# Altium PCB PCB1.PcbDoc
Units mil, origin at the board's own origin, x right, y up, seen from the top; angles counter-clockwise.
Board outline 15980 x 10455 mil, 2 copper layers (Top Layer, Bottom Layer); 35 components, 50 nets, 248 pads, 55 vias.
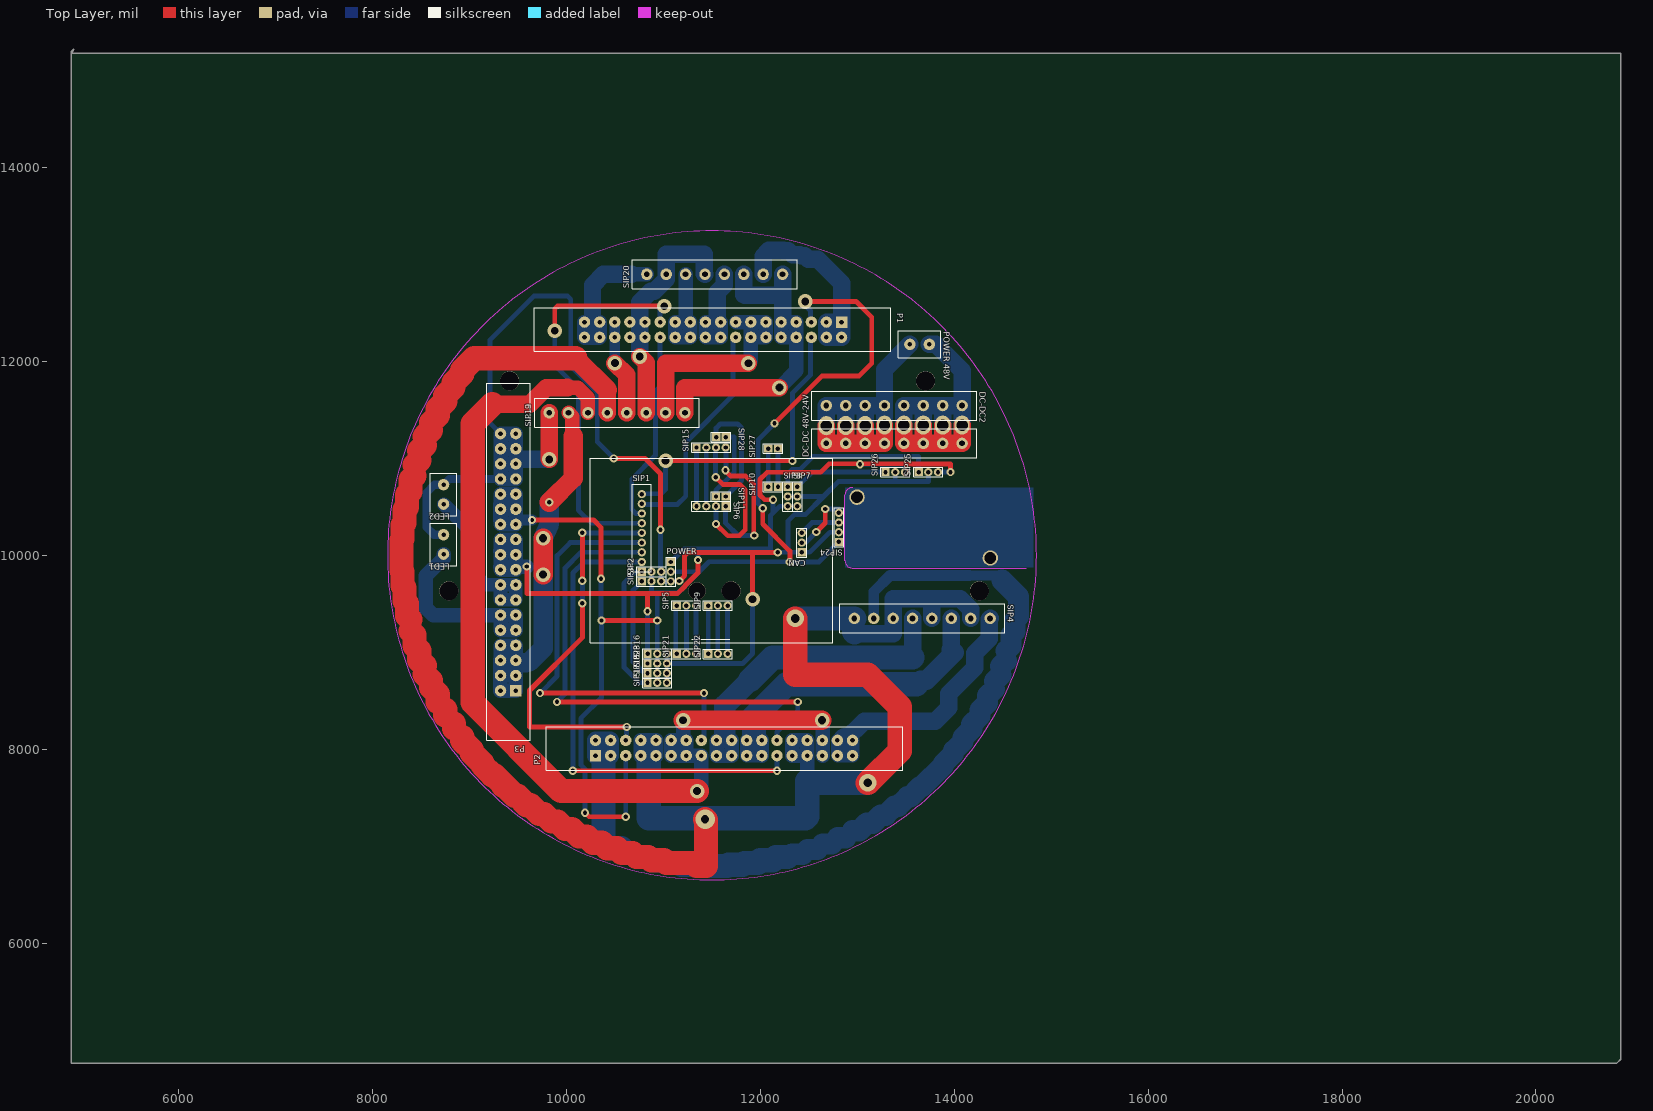
[diagram p0: Top Layer view]
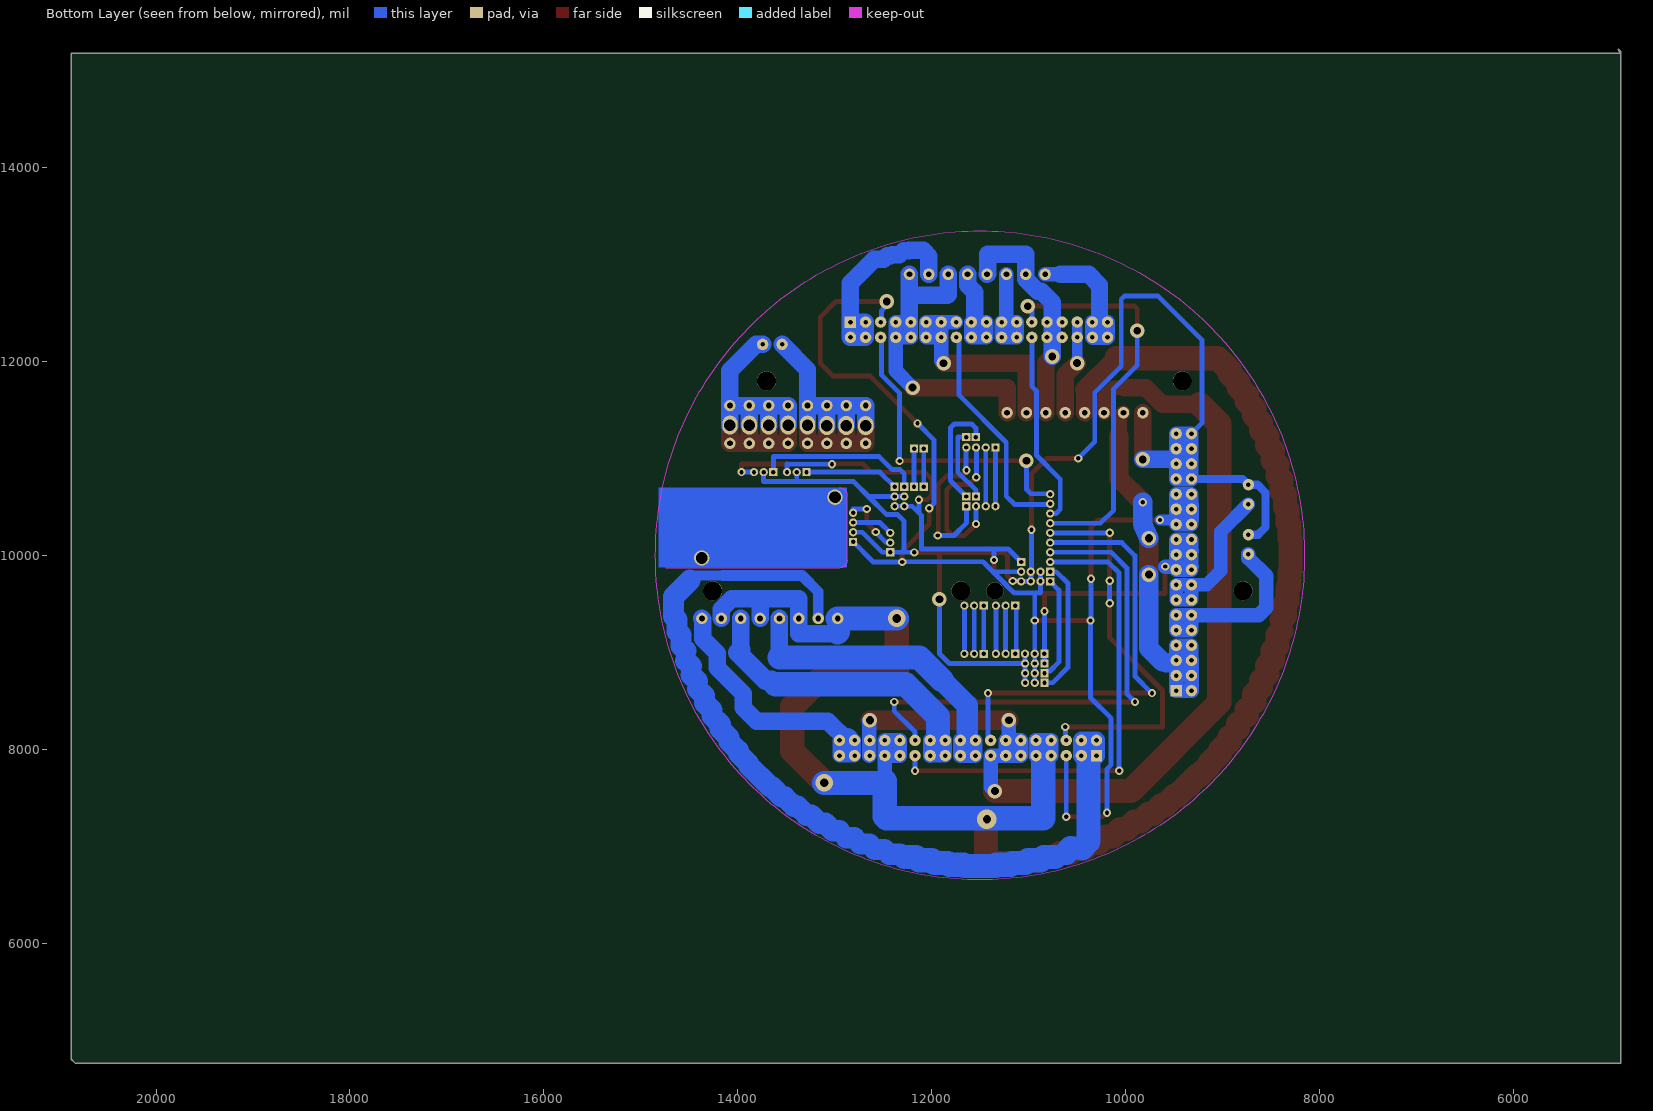
[diagram p1: Bottom Layer view, seen from below]

## Layer stack, top to bottom
Top Layer: signal copper 1.4
Dielectric: dielectric 12.6, FR-4, Dk 4.8
Bottom Layer: signal copper 1.4

## Board outline
4900,15175 4905,15180 20875,15180 20875,4805 20835,4765 4895,4765 4895,15195 4920,15220

## Design rules (kind name [scope] priority, off if disabled: settings)
Clearance [All] p1: gap=20
ComponentClearance [All] p1 off: gap=10 collisioncheckmode=3 verticalgap=10 showdistances=FALSE
PolygonConnect [All] p1: connectstyle=Relief reliefconductorwidth=10 reliefentries=4 polygonreliefangle="90 Angle"
RoutingVias [All] p1: holewidth=45 width=45 viastyle="Through Hole" minholewidth=45 minwidth=65 maxholewidth=500 maxwidth=500
SilkscreenOverComponentPads [All] p1: minsilkscreentomaskgap=10
SolderMaskExpansion [All] p1: expansion=4
Width [All] p1: maxlimit=500 minlimit=10 preferedwidth=30
26 further rules are at their usual default settings.

## Components (designator, comment, footprint, x,y, rotation, side; value= is the part's Value field where it differs from the comment)
CAN "SIP3" SIP3 12429,10032 r180 top
DC-DC2 "SIP8" DIP8-3MM 14082,11545 r270 top
"DC-DC 48V-24V" "SIP8" DIP8-3MM 12682,11155 r90 top
LED1 "SIP2" SIP2-3MM 8735,10213 r270 top
LED2 "SIP2" SIP2-3MM 8735,10729 r270 top
P1 "Header" DIP36-3.96MM 12839,12406 r270 top
P2 "Header" DIP36-3.96MM 10302,7935 r90 top
P3 "POWER_18*2" DIP36-3.96MM 9480,8605 r180 top
POWER "SIP3" SIP3 11079,9932 r0 top
"POWER 48V" "SIP2" SIP2-3MM 13544,12176 r0 top
SIP1 "SIP8" SIP8 10779,10632 r0 top
SIP2 "SIP3" SIP3 10779,9832 r90 top
SIP3 "SIP3" SIP3 10779,9732 r90 top
SIP4 "SIP8" DIP8-3MM 14371,9350 r270 top
SIP5 "SIP3" SIP3 11139,9482 r90 top
SIP6 "SIP4" SIP4 11644,10507 r270 top
SIP7 "SIP3" SIP3 12384,10707 r0 top
SIP8 "SIP3" SIP3 12284,10707 r0 top
SIP9 "SIP3" SIP3 11464,9482 r90 top
SIP10 "SIP2" SIP2 12184,10707 r180 top
SIP11 "SIP2" SIP2 11544,10607 r0 top
SIP15 "SIP4" SIP4 11344,11112 r90 top
SIP16 "SIP3" SIP3 10839,8985 r90 top
SIP17 "SIP3" SIP3 10838,8686 r90 top
SIP18 "SIP3" SIP3 10838,8785 r90 top
SIP19 "SIP8" DIP8-3MM 9824,11471 r90 top
SIP20 "SIP8" DIP8-3MM 10831,12899 r90 top
SIP21 "SIP3" SIP3 11139,8985 r90 top
SIP22 "SIP3" SIP3 11464,8984 r90 top
SIP23 "SIP3" SIP3 10838,8885 r90 top
SIP24 "SIP4" SIP4 12812,10139 r180 top
SIP25 "SIP3" SIP3 13634,10859 r90 top
SIP26 "SIP3" SIP3 13293,10859 r90 top
SIP27 "SIP2" SIP2 12183,11101 r180 top
SIP28 "SIP2" SIP2 11546,11220 r0 top

## Footprints (in the part's own frame and the unit in brackets; to place one, negate y for a bottom-side part, rotate by r counter-clockwise, add the part's x,y. Pads: shape width x height; smd on the part's side, far side on the other; paste and mask are expansions set on the pad)
DIP8-3MM [mm]
  round 3 hole 1.5: 1(0,0) 2(0,-5.08) 3(0,-10.16) 4(0,-15.24) 5(0,-20.32) 6(0,-25.4) 7(0,-30.48) 8(0,-35.56)
  silkscreen extent -3.81,-39.37 3.81,3.81
DIP36-3.96MM [mm]
  rect 3x3 hole 1.2: 1(0,0)
  round 3 hole 1.2: 2(4,0) 3(0,-3.96) 4(4,-3.96) 5(0,-7.92) 6(4,-7.92) 7(0,-11.88) 8(4,-11.88) 9(0,-15.84) 10(4,-15.84) 11(0,-19.8) 12(4,-19.8) 13(0,-23.76) 14(4,-23.76) 15(0,-27.72) 16(4,-27.72) 17(0,-31.68) 18(4,-31.68) 19(0,-35.64) 20(4,-35.64) 21(0,-39.6) 22(4,-39.6) 23(0,-43.56) 24(4,-43.56) 25(0,-47.52) 26(4,-47.52) 27(0,-51.48) 28(4,-51.48) 29(0,-55.44) 30(4,-55.44) 31(0,-59.4) 32(4,-59.4) 33(0,-63.36) 34(4,-63.36) 35(0,-67.32) 36(4,-67.32)
  silkscreen extent -3.81,-80.52 7.62,12.95
SIP2 [mil]
  rect 85x85 hole 45: 1(0,0) 2(100,0)
  silkscreen extent -50,-50 150,50
SIP2-3MM [mm]
  round 3 hole 1.2: 1(0,0) 2(5.08,0)
  silkscreen extent -3.05,-3.51 8.08,3.51
SIP3 [mil]
  rect 85x85 hole 45: 1(0,0)
  round 85 hole 45: 2(0,-100) 3(0,-200)
  silkscreen extent -50,-250 50,50
SIP4 [mil]
  rect 85x85 hole 45: 1(0,0)
  round 85 hole 45: 2(0,-100) 3(0,-200) 4(0,-300)
  silkscreen extent -50,-350 50,50
SIP8 [mil]
  round 85 hole 45: 1(0,0) 2(0,-100) 3(0,-200) 4(0,-300) 5(0,-400) 6(0,-500) 7(0,-600) 8(0,-700)
  silkscreen extent -100,-800 100,100

## Free pads (board coordinates)
  oval 157.48x196.85 hole 118.11: 0(12682,11337) 1(12882,11339) 2(13082,11339) 3(13282,11344) 4(13482,11343) 5(13682,11344) 6(13882,11343) 7(14082,11344)
  round 196.85 hole 196.85: 2(8789,9634) 5(14260.06,9634) 7(13705,11799.21) 8(9416,11799.21) 11(11701,9634)
  round 157.48 hole 118.11: 5(14374,9974) 6(13000,10602) 11(12998,10600) 12(14372,9972)
  round 177.17 hole 177.17: 9(11348.06,9634)

## Via types
v1: diameter 85, hole 45, Top Layer to Bottom Layer, 37 vias
v2: diameter 150, hole 80, Top Layer to Bottom Layer, 10 vias
v3: diameter 150, hole 85, Top Layer to Bottom Layer, 5 vias
v4: diameter 180, hole 90, Top Layer to Bottom Layer, 2 vias
v5: diameter 200, hole 85, Top Layer to Bottom Layer, 1 vias

## Nets (pads, with @x,y where several pads share a name; then routed paths per layer and width w, separated by ;. In a path a pad name is that pad's centre, name@x,y a point inside that pad or via, vN(x,y) a via of type N, cw(c..) or ccw(c..) an arc to the next point about the centre after c; other vN are vias at no path point)
5V: P1.5 P2.5 P3.23 P3.24 P3.25 P3.26 P3.27 P3.28 POWER.2 SIP2.2 SIP3.2 SIP16.2 SIP17.2 SIP18.2 SIP23.2 SIP24.1 | length 14752.2
  Top Layer w50: v1(9647,10365) 10283,10365 10358,10290 10358,9761 v1(10359,9760) ; v1(10193,7347) 10235.81,7304.19 v1(10613.81,7304.19) ; v1@10358,9328 v1(10364,9328) v1(10939,9328) ; v1(12027,10486) 12026,10487 12026,10324 12306,10044 v1(12306,9932) ; v1(12148,11361) 12149,11361 12639,11851 13021,11851 13150,11980 13150,12457 12989,12618 v2(12466,12618)
  Bottom Layer w30: P2.5@10622,7935 P2.5@10645,7935
  Bottom Layer w50: v1(10193,7347) 10193,7798 10151,7840 10151,8319 10364,8532 v1(10364,9328) ; v1@10358,9328 10359,9329 v1(10359,9760) ; v1(10613.81,7304.19) P2.5 ; SIP2.2 SIP3.2 10879,9614 11152.6,9614 11196.1,9657.5 11198.1,9657.5 11224.42,9683.82 11224.42,9685.82 11472.6,9934 12306,9934 v1(12306,9932) 12605,9932 SIP24.1 ; SIP17.2 SIP18.2 SIP23.2 SIP16.2@10938,8984 ; SIP16.2 v1(10939,9328) 10939,9590 ; POWER.2 11359,9832 ; v1@12026,10487 11979,10534 11979,11192 v1(12148,11361) ; v2@12466,12574 12519,12521 P1.5@12519,12406
  Bottom Layer w110: P3.23@9480,10365 v1(9647,10365)
  Bottom Layer w150: P3.24@9322.52,10365 P3.24 P3.23 9480,10365 P3.25 ; P3.24@9322.52,10365 P3.26 ; P3.24@9322.52,10365 9320,10365 9320,10525 P3.26@9322.52,10525 ; P3.26 P3.25 ; P3.26 P3.26@9322.52,10525 ; P3.26@9322.52,10525 9322.52,10627.68 9480,10627.68 P3.25
9V: P3.17 P3.18 P3.19 P3.20 P3.21 P3.22 POWER.1 SIP7.3 SIP8.3 SIP16.1 SIP23.1 SIP25.3 SIP26.3 | length 9805.2
  Top Layer w50: v1(9594,9885) 9594,9606 10838,9606 ; v1(10838,9424) 10838,9606 ; v1(11359,9952) 11359,9819.77 11224.42,9685.19 11224.42,9683.82 11146.6,9606 10838,9606 ; v1(12133,10574) 12046,10574 11998,10622 11998,10785 12071,10858 12624,10858 12711,10945 13494,10945 13493,10944 13493,10941 13962,10941 v1(13962,10859)
  Bottom Layer w50: P3.18 9322.52,9885 P3.20 P3.22 ; SIP23.1 v1(10838,9424) ; POWER.1 11213,10066 11363,10066 ; v1(11359,9952) 11359,10062 11363,10066 ; v1(12133,10574) 12133,10438 ; SIP7.3 SIP8.3 12202,10507 12133,10438 ; v1(13030,10940) 13492,10940 13493,10941 SIP26.3 ; SIP25.3 v1(13962,10859) ; 11363,10066 12105.4,10066 12105.4,10410.4 12133,10438
  Bottom Layer w150: P3.18@9320,9885 9322.52,9885 P3.17@9480,9885 ; P3.20@9320,10045 9480,10045 P3.19 ; v1(9594,9885) P3.17@9480,9885 ; P3.17@9480,9885 P3.17 P3.18 9322.52,10159.96 9480,10159.96 P3.19 ; P3.17@9480,9885 P3.19
12V_1: LED1.2 P3.9 P3.10 P3.11 P3.12 | length 2057.6
  Bottom Layer w150: LED1.2 8735,9973 8551,9789 8551,9462 8628.47,9384.53 P3.12 ; P3.12 P3.10 P3.9 P3.11 P3.12
12V_2: LED2.2 P3.13 P3.14 P3.15 P3.16 | length 1794.7
  Bottom Layer w140: LED2.2 9021,10243 9021,9841 9165.66,9696.34 P3.16 ; P3.16 P3.15 P3.13 P3.14 9322.52,9565 P3.16
DC24V_1+: P1.7 P1.8 P1.9 P1.10 SIP19.8 SIP20.6 SIP20.8 | length 3549.6
  Top Layer w180: SIP19.8 11224,11730 v2(12199,11730)
  Bottom Layer w150: v2(12199,11730) 12371.28,11902.28 P1.8 ; P1.8 12219.47,12248.52 12219.47,12406 12234.47,12406 P1.7 P1.8
  Bottom Layer w180: SIP20.6 11831,12690 11840,12681 12231,12681 ; SIP20.8 12231,12681 ; P1.9@12234.47,12406 12234.47,12677.53 12231,12681
DC24V_1-: P1.11 P1.12 P1.13 P1.14 P1.15 SIP19.7 | length 2421.3
  Top Layer w180: SIP19.7 11024,11981 v2(11879,11981)
  Bottom Layer w150: P1.15@11751.76,12406 P1.13 ; v2(11879,11981) 11903.57,12005.57 P1.14 ; P1.14 P1.12 P1.11 P1.13 ; P1.14 P1.13
DC24V_2+: P1.27 P1.28 P1.29 P1.30 SIP19.6 SIP20.2 SIP20.4 | length 2447.7
  Top Layer w180: v2(10758,12051) 10824,11985 SIP19.6
  Bottom Layer w180: v2@10759,12051 P1.27@10759,12406 ; 10759,12458.13 P1.27@10759,12406 ; SIP20.4 11424,12906 11424,13104 11031,13104 SIP20.2 11031,12847 10908,12724 10871,12724 10759,12612 P1.27@10759,12406
DC24V_2-: P1.31 P1.32 SIP19.5 | length 986.2
  Top Layer w180: v3(10502,11983) 10624,11861 SIP19.5
  Bottom Layer w110: P1.31 P1.32 10500.42,11984.58 v3(10502,11983)
DC24V_3+: P2.7 P2.8 P2.9 P2.10 P2.27 P2.28 P2.29 P2.30 SIP4.2 SIP4.4 SIP4.6 SIP4.8 SIP19.4 | length 18788.7
  Top Layer w180: SIP19.4 10424,11705
  Top Layer w200: 10096.36,12032.64 10424,11705
  Top Layer w250: 8300.98,9842.67 8300.98,9996.14 ; 8300.98,10002.58 8300.98,10157.33 ; 8312.56,9685.72 8312.56,9831.09 ; 8312.56,10168.91 8312.56,10314.28 ; 8331.83,9529.52 8331.83,9666.45 ; 8331.83,10333.55 8331.83,10470.48 ; 8358.73,9502.61 8358.73,9374.46 8393.21,9339.98 ; 8358.73,10497.39 8358.73,10625.54 ; 8393.21,9220.9 8435.19,9178.93 8435.19,9069.22 ; 8393.21,10660.02 8393.21,10779.1 8435.19,10821.07 ; 8435.19,10930.78 8484.56,10980.14 ; 8484.56,9019.86 8484.56,8919.79 8541.2,8863.15 ; 8484.56,11080.21 8541.2,11136.85 ; 8541.2,8772.96 8604.97,8709.18 ; 8541.2,11227.04 8604.97,11290.82 ; 8604.97,8638 8675.73,8567.24 8675.73,8488.5 ; 8604.97,11370.92 8675.73,11441.68 ; 8675.73,11511.5 8753.3,11589.07 ; 8753.3,8351.57 8753.3,8410.93 ; 8753.3,11648.43 8837.5,11732.63 ; 8837.5,11781.39 8928.12,11872.01 ; 8841.55,8214.55 8841.55,8263.32 ; 8928.12,8127.99 8928.12,8089.94 9024.95,7993.11 9024.95,7965.87 9135.22,7855.59 9135.22,7839.22 9236.26,7738.18 9236.26,7732.72 9258.1,7732.72 9350.24,7640.57 9350.24,7624.2 9366.61,7624.2 9469.41,7521.4 9496.66,7521.4 9593.48,7424.58 9631.53,7424.58 9722.15,7333.96 9770.92,7333.96 9849.94,7254.94 9909.3,7254.94 9986.62,7177.62 10056.43,7177.62 10132.62,7101.43 10212.72,7101.43 10276.5,7037.65 10366.69,7037.65 10423.33,6981.01 10523.4,6981.01 10572.77,6931.65 10682.47,6931.65 10724.45,6889.67 10843.52,6889.67 10878,6855.19 11006.16,6855.19 11033.06,6828.28 11315.37,6828.28 11346.21,6797.44 11440,6797.44 11440,7272 v5(11432,7280) ; 8928.12,11910.06 9050.69,12032.64 10096.36,12032.64 ; v4(12362,9350) 12359,9347 12359,9339 12361,9337 12361,8768 13109,8768 13439,8438 13439,7983 v4(13110,7654)
  Bottom Layer w85: P2.7@10782,7935 10851,7935
  Bottom Layer w110: P2.8@10782,8092.48 10782,8095 10942,8095 P2.9@10942,7935
  Bottom Layer w150: P2.7@10782,7935 P2.7 P2.8 10782,8092.48 P2.10 P2.9 P2.9@10869,7935 ; 12504,7654 12484.68,7673.32 P2.29 ; P2.29 P2.30 P2.28 P2.27 P2.29
  Bottom Layer w180: 12973,9208 12990.06,9190.94 13370.94,9190.94 13371,9191 SIP4.6 13371,9551.81 13771,9551.81 ; SIP4.4 13771,9551.81 ; SIP4.2 14171,9442.44 14061.63,9551.81 13771,9551.81
  Bottom Layer w200: 12971,9210 SIP4.8
  Bottom Layer w250: 10851,7935 10851,7289 12467,7289 12484.68,7306.68 12484.68,7673.32 ; v4(12362,9350) SIP4.8 ; 12504,7654 v4(13110,7654) ; 12971,9210 12973,9208
DC24V_3-: P2.11 P2.12 P2.13 P2.14 P2.15 P2.31 P2.32 SIP19.3 | length 10327.6
  Top Layer w150: 10013,11729 10121,11729 10224,11626 SIP19.3
  Top Layer w180: 9236,11559 9623,11559 9793,11729 10013,11729 10009,11733
  Top Layer w200: v2(11205,8301) v3(12638,8301)
  Top Layer w250: 9236,11559 9035,11358 9035,8483 9949,7569 v3@11348,7569
  Bottom Layer w150: P2.13@11205,7967.43 P2.13 ; v2(11205,8301) P2.14@11205,8092.48 ; v3(11349,7569) 11393.34,7613.34 P2.15 P2.13 ; v3(12638,8301) 12644.68,8294.32 P2.31@12644.68,7935 ; P2.14@11205,8092.48 11085.62,8092.48 11085.62,7935 P2.13 ; P2.14@11205,8092.48 P2.14 P2.13
DC24V_4+: P3.1 P3.2 P3.3 P3.4 P3.5 P3.6 P3.7 P3.8 SIP19.2 | length 4928.5
  Top Layer w150: SIP19.2 10064,11431 10064,11235
  Top Layer w200: v3(9761,9802) v3(9761,10176) ; v1(9826,10549) 10072,10795 10072,11227
  Bottom Layer w150: P3.6 P3.6@9322.52,8925 ; P3.4@9320,8765 P3.3@9480,8765 ; P3.4@9320,8765 9320,8925 P3.6@9322.52,8925 ; P3.4@9320,8765 9320,8605 P3.2 P3.1 ; P3.6@9322.52,8925 9322.52,9068.62 P3.7@9480,9068.62 ; P3.6@9322.52,8925 P3.5@9480,8925 ; P3.1 P3.3@9480,8765 ; P3.1 P3.7@9480,9068.62 ; P3.3@9480,8765 9480,8893 P3.5 P3.5@9480,8925 ; P3.5@9480,8925 P3.7@9480,9068.62
  Bottom Layer w200: P3.5@9480,8893 9571.58,8893 ccw(c9571.58,8993) 9642.29,8922.29 9761,9041 v3(9761,9802) ; v3(9761,10176) 9826,10326 v1(9826,10549)
DC24V_4-: CAN.1 LED1.1 LED2.1 P3.29 P3.30 P3.31 P3.32 P3.33 P3.34 P3.35 P3.36 POWER.3 SIP2.3 SIP3.3 SIP7.2 SIP8.2 SIP16.3 SIP17.3 SIP18.3 SIP19.1 SIP23.3 SIP24.2 SIP25.2 SIP26.2 | length 16299.2
  Top Layer w50: v1(10490,11000) 10812,11000 10972,10840 v1(10972,10265) ; v1(11165,9736) 11166,9735 11221,9790 11221,9998 11256,10033 ; 11255,10031 11922,10031 ; v2(11922,9547) 11922,9699 11921,9700 11921,10030 11922,10031 ; v1(12180,10031) 11922,10031
  Top Layer w180: SIP19.1 9824,10991 v2(9825,10990)
  Bottom Layer w50: P3.36 9214.57,11363.34 9214.57,12223.57 9665,12674 10014,12674 10047,12641 10047,11951 10320,11678 10320,11170 v1(10490,11000) ; v1@10979,10258 v1(10972,10265) 10972,9839 SIP2.3 SIP3.3 POWER.3 11082,9735 11166,9735 v1(11165,9736) ; SIP23.3 SIP23.3@11039,8885 ; SIP17.3@11039,8687 SIP23.3@11039,8885 ; SIP16.3 SIP23.3@11039,8885 ; v2(11922,9547) 11922,8988 11819,8885 SIP23.3@11039,8885 ; v1(12180,10031) 12181,10032 12288,10032 ; SIP8.2 SIP7.2 12653,10607 ; 12594,10607 12653,10607 ; SIP24.2 12718,10239 12511,10032 CAN.1 12288,10032 ; SIP26.2 13393,10761 ; SIP25.2 13734,10761 13393,10761 ; 12288,10032 12288,10355 12353,10420 12466,10420 12653,10607 ; 12653,10607 12807,10761 13393,10761
  Bottom Layer w85: LED1.1 8635,10213 8558,10290 8558,10646 8641,10729 LED2.1 8793.68,10787.68 P3.30
  Bottom Layer w150: P3.32 P3.30 P3.29 P3.31 ; P3.32 P3.34 ; P3.32 P3.31 ; P3.34 P3.36 P3.35 P3.33 ; P3.34 P3.33 ; P3.31 P3.33
  Bottom Layer w180: P3.31@9499,10990 v2(9825,10990)
NetCAN_2: CAN.2 SIP24.4 | length 657.3
  Top Layer w50: v1(12578,10241) 12671,10334 v1(12671,10478)
  Bottom Layer w50: CAN.2@12438.6,10132 CAN.2 12469,10132 v1(12578,10241) ; v1(12671,10478) SIP24.4@12811,10478 ; SIP24.4 SIP24.4@12812,10477
NetCAN_3: CAN.3 SIP24.3 | length 427.3
  Bottom Layer w50: CAN.3 12536,10339 SIP24.3
NetSIP2_1: SIP2.1 SIP17.1 | length 1407
  Bottom Layer w50: SIP2.1 10717,9832 10596,9711 10596,8845 10755,8686 SIP17.1
NetSIP3_1: SIP3.1 SIP18.1 | length 1066.2
  Bottom Layer w50: SIP3.1 10689,9642 10689,8899.5 10781,8807.5 10815.5,8807.5 SIP18.1
NetSIP5_1: SIP5.1 SIP21.1 | length 1009.7
  Bottom Layer w30: 11120,9037 11139,9018 SIP21.1 SIP5.1 11120,9463 11120,9037
NetSIP5_2: SIP5.2 SIP21.2 | length 537.7
  Bottom Layer w30: SIP21.2 SIP21.2@11239,9005.36 ; SIP5.2@11239,9461.64 SIP5.2
  Bottom Layer w50: SIP21.2 SIP5.2
NetSIP5_3: SIP5.3 SIP21.3 | length 511
  Bottom Layer w30: SIP5.3@11339,9468 SIP5.3
  Bottom Layer w50: SIP21.3 SIP5.3
NetSIP6_1: SIP6.1 SIP15.4 | length 1652.7
  Top Layer w50: v1(11642,10879) 11642,10874 11698,10818 11851,10818 11934,10735 11934,10210 v1(11939,10205)
  Bottom Layer w50: v1(11642,10879) 11646,10875 11646,11110 SIP15.4 ; SIP6.1 11644,10332 11771,10205 v1(11939,10205)
NetSIP6_2: SIP6.2 SIP15.3 | length 1639.6
  Top Layer w50: v1(11541,10805) 11614,10732 11790,10732 11846,10676 11846,10263 11786,10203 11665,10203 v1(11544,10324)
  Bottom Layer w50: v1(11541,10805) 11541,11109 SIP15.3 ; v1(11544,10324) SIP6.2
NetSIP6_3: SIP6.3 SIP15.2 | length 605
  Bottom Layer w50: SIP6.3 SIP15.2
NetSIP6_4: SIP6.4 SIP15.1 | length 605
  Bottom Layer w50: SIP6.4 SIP15.1
NetSIP7_1: SIP7.1 SIP26.1 | length 972
  Bottom Layer w50: SIP7.1 12536,10859 SIP26.1
NetSIP8_1: SIP8.1 SIP25.1 | length 1718
  Bottom Layer w50: SIP8.1 12284,10841.5 12326.5,10884 12407,10884 12542,11019 13634,11019 SIP25.1
NetSIP9_1: SIP9.1 SIP22.1 | length 498
  Bottom Layer w50: SIP22.1 SIP9.1
NetSIP9_2: SIP9.2 SIP22.2 | length 499.4
  Bottom Layer w30: SIP22.2@11562.33,8985.67 SIP22.2 ; SIP9.2@11562.33,9480.33 SIP9.2
  Bottom Layer w50: SIP22.2@11562.33,8985.67 SIP9.2@11562.33,9480.33
NetSIP9_3: SIP9.3 SIP22.3 | length 498
  Bottom Layer w50: SIP22.3 SIP9.3
NetSIP10_1: SIP10.1 SIP27.1 | length 394.4
  Bottom Layer w50: SIP27.1 12183,10708 SIP10.1
NetSIP10_2: SIP10.2 SIP27.2 | length 394.4
  Bottom Layer w50: SIP27.2 12084,11100 SIP10.2
NetSIP11_1: SIP11.1 SIP28.2 | length 776.9
  Bottom Layer w50: SIP11.1 11544,10670 11732,10858 11732,11220 SIP28.2
NetSIP11_2: SIP11.2 SIP28.1 | length 1163.5
  Bottom Layer w50: SIP28.1 11546,11312 11589,11355 11768,11355 11807,11316 11807,10770 SIP11.2
OUT1: P1.1 P1.2 P1.3 P1.4 SIP20.7 | length 2234.9
  Bottom Layer w180: SIP20.7 12031,13086 ; 12069,13124 12031,13086 ; 12031,13086 12089.29,13144.29 12237,13144.29 12237.57,13143.72 12291.72,13143.72 12333.58,13101.86 12409,13101.86 12423.19,13087.67 12458.67,13087.67 12494.39,13051.95 12595.55,13051.95 12839,12808.5 P1.1 ; P1.1 P1.2 12686.24,12248.52 12686.24,12406 P1.1
OUT2: P1.17 P1.18 P1.19 P1.20 SIP20.5 | length 1113.4
  Bottom Layer w150: P1.20@11439.94,12248.52 P1.18 P1.17 11439.94,12406 P1.20@11439.94,12248.52
  Bottom Layer w180: P1.17@11559,12434.06 11559,12712 11631,12784 SIP20.5
OUT3: P1.21 P1.22 P1.23 P1.24 SIP20.3 | length 1088.8
  Bottom Layer w150: P1.21@11231,12437 SIP20.3 ; P1.24 P1.22 P1.21 P1.23 P1.24
OUT4: P1.33 P1.34 P1.35 P1.36 SIP20.1 | length 1648.3
  Bottom Layer w150: P1.36 P1.35 10294,12406 P1.33 P1.34 10341.99,12246 P1.36@10191.13,12246 ; 10673,12899 SIP20.1
  Bottom Layer w180: P1.33@10294,12380.51 10294,12406 10271,12429 10271,12788 10382,12899 10673,12899
OUT5: P2.1 P2.2 P2.3 P2.4 SIP4.7 | length 7805
  Bottom Layer w100: 14020,9792.43 14493,9792.43 14493,9743.16
  Bottom Layer w110: SIP4.7 13171,9626 13338,9793 14157.43,9793 14158,9792.43
  Bottom Layer w180: P2.1 P2.2 ; P2.2@10302,8095 P2.2 ; P2.3@10454.76,7935 10454.76,8092.48 P2.2
  Bottom Layer w219.69: 14266.79,8403.42 14344.73,8481.36 ; 14344.73,8551.5 14415.82,8622.6 ; 14415.82,8703.07 14479.9,8767.15 ; 14479.9,8857.77 14536.81,8914.68 ; 14493,9743.16 14663.23,9572.93 14663.23,9371.5 ; 14536.81,9015.22 14586.41,9064.82 14586.41,9175.05 ; 14628.58,9217.22 14628.58,9336.85
  Bottom Layer w220: 12328.46,6917.29 12438.67,6917.29 ; 12488.27,6966.88 12588.81,6966.88 ; 12645.71,7023.79 12736.33,7023.79 ; 12800.41,7087.86 12880.88,7087.86 ; 12951.97,7158.96 13022.11,7158.96 13100.05,7236.89 ; 13159.69,7236.89 13244.28,7321.48 ; 13293.27,7321.48 13384.32,7412.53 ; 13422.55,7412.53 13519.82,7509.8 ; 13547.19,7509.8 13650.47,7613.08 ; 13666.92,7613.08 13890.46,7836.62 ; 13890.46,7853.07 13993.74,7956.35 ; 13993.74,7983.72 14091.02,8081 ; 14091.02,8119.23 14182.06,8210.27 ; 14182.06,8259.26 14266.65,8343.86
  Bottom Layer w250: 10384,7935 10384,7052.01 10455,6981.01 ; 10567.63,6981.01 10617,6931.65 ; 10730,6889.67 10843.52,6889.67 ; 10878,6855.19 11006.16,6855.19 ; 11033.06,6828.28 11169.99,6828.28 ; 11189.26,6809.02 11334.63,6809.02 ; 11346.21,6797.44 11499.68,6797.44 ; 11507.41,6797.44 11660.88,6797.44 ; 11672.45,6809.02 11817.83,6809.02 ; 11837.09,6828.28 11974.02,6828.28 ; 12000.93,6855.19 12129.09,6855.19 ; 12163.57,6889.67 12282.64,6889.67
OUT6: P2.17 P2.18 P2.19 P2.20 SIP4.5 | length 3460.4
  Bottom Layer w85: P2.18@11582,8092.48 P2.18@11582,8095
  Bottom Layer w150: P2.18@11553.34,8088.39 11553.34,7935 P2.19 P2.20 P2.18@11582,8092.48
  Bottom Layer w180: 13571,8948 SIP4.5
  Bottom Layer w220: 11635,8124 11635,8453 11898,8716
  Bottom Layer w250: 11898,8716 12130,8948 13571,8948
OUT7: P2.21 P2.22 P2.23 P2.24 SIP4.3 | length 3573.3
  Bottom Layer w140: P2.23 P2.21 P2.22 11936,8092.48 P2.24
  Bottom Layer w150: P2.23 P2.24
  Bottom Layer w180: 13971,9029 SIP4.3
  Bottom Layer w200: 13613,8671 13655,8713 13715,8713 14001,8999 13971,9029
  Bottom Layer w250: 11936,8092.48 11936,8336 12271,8671 13613,8671
OUT8: P2.33 P2.34 P2.35 P2.36 SIP4.1 | length 3008.7
  Bottom Layer w140: P2.33@12799.68,7935 12799.68,8092.48 12874,8092.48 P2.36 P2.35 P2.33@12799.68,7935
  Bottom Layer w180: 12874,8092.48 13072.52,8291 13807,8291 13946,8430 13946,8575 14211,8840 14211,8989 14361,9139 14361,9340 SIP4.1
  Bottom Layer w250: 12874,8012 12874,8092.48
"POWER 48V+": "DC-DC 48V-24V.5" "DC-DC 48V-24V.6" "DC-DC 48V-24V.7" "DC-DC 48V-24V.8" "POWER 48V.2" DC-DC2.1 DC-DC2.2 DC-DC2.3 DC-DC2.4 pad.4 pad.5@13682,11344 pad.6@13882,11343 pad.7@14082,11344 | length 3567.3
  Top Layer w180: pad.4 13482,11155 13682,11155 ; pad.5@13682,11344 13682,11155 ; pad.6@13882,11343 13882,11155 ; pad.7@14082,11344 14082,11155 13882,11155 ; 13682,11155 13882,11155
  Bottom Layer w180: pad.4@13482,11345 DC-DC2.4 DC-DC2.3 ; pad.5@13682,11343 DC-DC2.3 ; 13744,12176 13811,12176 14082,11905 DC-DC2.1 ; pad.6@13882,11345 DC-DC2.2 ; pad.7@14082,11344 DC-DC2.1 ; DC-DC2.3 DC-DC2.2 ; DC-DC2.2 DC-DC2.1
"POWER 48V-": "DC-DC 48V-24V.1" "DC-DC 48V-24V.2" "DC-DC 48V-24V.3" "DC-DC 48V-24V.4" "POWER 48V.1" DC-DC2.5 DC-DC2.6 DC-DC2.7 DC-DC2.8 pad.0 pad.1 pad.2@13082,11339 pad.3 | length 3497.5
  Top Layer w180: pad.0 12682,11155 12882,11155 ; pad.1 12882,11155 ; pad.2@13082,11339 13082,11155 ; pad.3 13282,11155 13082,11155 ; 12882,11155 13082,11155
  Bottom Layer w180: pad.0@12680,11337 DC-DC2.8@12680,11543 ; DC-DC2.8 DC-DC2.7 ; pad.1 DC-DC2.7 ; pad.2@13082,11339 DC-DC2.6 ; pad.3 DC-DC2.5 ; 13544,12176 13282,11914 DC-DC2.5 ; DC-DC2.7 DC-DC2.6 ; DC-DC2.6 DC-DC2.5
PWM1: P1.6 SIP1.1 | length 3218.6
  Top Layer w50: v2(11024,10976) v1@12332,10976
  Bottom Layer w50: SIP1.1 10782,10635 10978,10635 11024,10681 v2(11024,10976) ; v1(12332,10974) 12332,11673 12520,11861 12520,12245 P1.6@12519,12246
PWM2: P1.16 SIP1.2 | length 2328.8
  Bottom Layer w50: SIP1.2 10786,10525 11147,10525 11232,10610 11232,11164 11719,11651 P1.16@11719,12246
PWM3: P1.26 SIP1.3 | length 2015.3
  Bottom Layer w50: SIP1.3 10719,10432 10676,10475 10676,10787 10919,11030 10919,11694 10968.13,11743.13 P1.26
PWM4: P1.25 SIP1.4 | length 4208.8
  Top Layer w50: v2(9882,12317) 9882,12542 9910,12570 v2(11012,12570)
  Bottom Layer w50: v2(9882,12317) 9882,11962 10126,11718 10126,10467 10261,10332 SIP1.4 ; P1.25 10968.13,12526.13 v2(11012,12570)
PWM5: P2.6 SIP1.5 | length 3979.2
  Top Layer w50: v1(10166,9506) 10166,9152 9621,8607 9621,8231 v1(10623,8231) ; v1(10166,9739) v1(10166,10233)
  Bottom Layer w50: v1(10166,9506) v1(10166,9739) ; v1@10166,10232 SIP1.5 ; P2.6@10622,8095 10622,8230 v1(10623,8231)
PWM6: P2.16 SIP1.6 | length 4595.4
  Top Layer w50: v1(9730,8580) v1(11421,8580)
  Bottom Layer w50: v1(9730,8580) 9906,8756 9906,9998 10040,10132 SIP1.6 ; v1(11421,8580) P2.16@11422,8095
PWM7: P2.26 SIP1.7 | length 5240.1
  Top Layer w50: v1(9905,8489) v1(12387,8489)
  Bottom Layer w50: v1(9905,8489) 9989,8573 9989,9870 10151,10032 SIP1.7 ; P2.26 12172.87,8178.87 12387,8393 v1(12387,8489)
PWM8: P2.25 SIP1.8 | length 5062.6
  Top Layer w50: v1@10064,7778 v1@10065,7779 ; v1@10066,7778 v1(10068,7778) v1(12173,7779)
  Bottom Layer w50: v1(10068,7778) 10068,9818 10181,9931 10778,9931 SIP1.8 ; v1@12172.87,7779 P2.25

## Keep-outs
Keep-Out Layer:
  circle w10: c11503.54,10000 r3346.46
  lines w8: 12874,9943 12874,10626 ; 12874,9952 ccw(c12953,9948) 12949,9869 ; 12874,10625 cw(c12953,10621) 12957,10700 ; 12948,9869 14742,9869

## Other copper
Bottom Layer:
  rectangle: 12874,9873 14818,10700

## Silkscreen, mask and mechanical layers (free items; w line width, h text height)
Top Overlay:
  lines w3: 12690,10441 12691,10440
  lines w5: 11292.06,9134 11685.76,9134 ; 10250,9100 12750,9100 ; 10250,9100 10250,11000 ; 10250,9100 10250,11000 ; 10250,9100 12750,9100 ; 10250,11000 12750,11000 ; 10250,11000 12750,11000 ; 12750,9100 12750,11000 ; 12750,9100 12750,11000